# Altium PCB Charging_PCB.PcbDoc
Units mm, origin at the board's own origin, x right, y up, seen from the top; angles counter-clockwise.
Board outline 58.8 x 34.09 mm, 2 copper layers (Top Layer, Bottom Layer), stack 1.57 mm thick; 66 components, 46 nets, 205 pads, 51 vias.
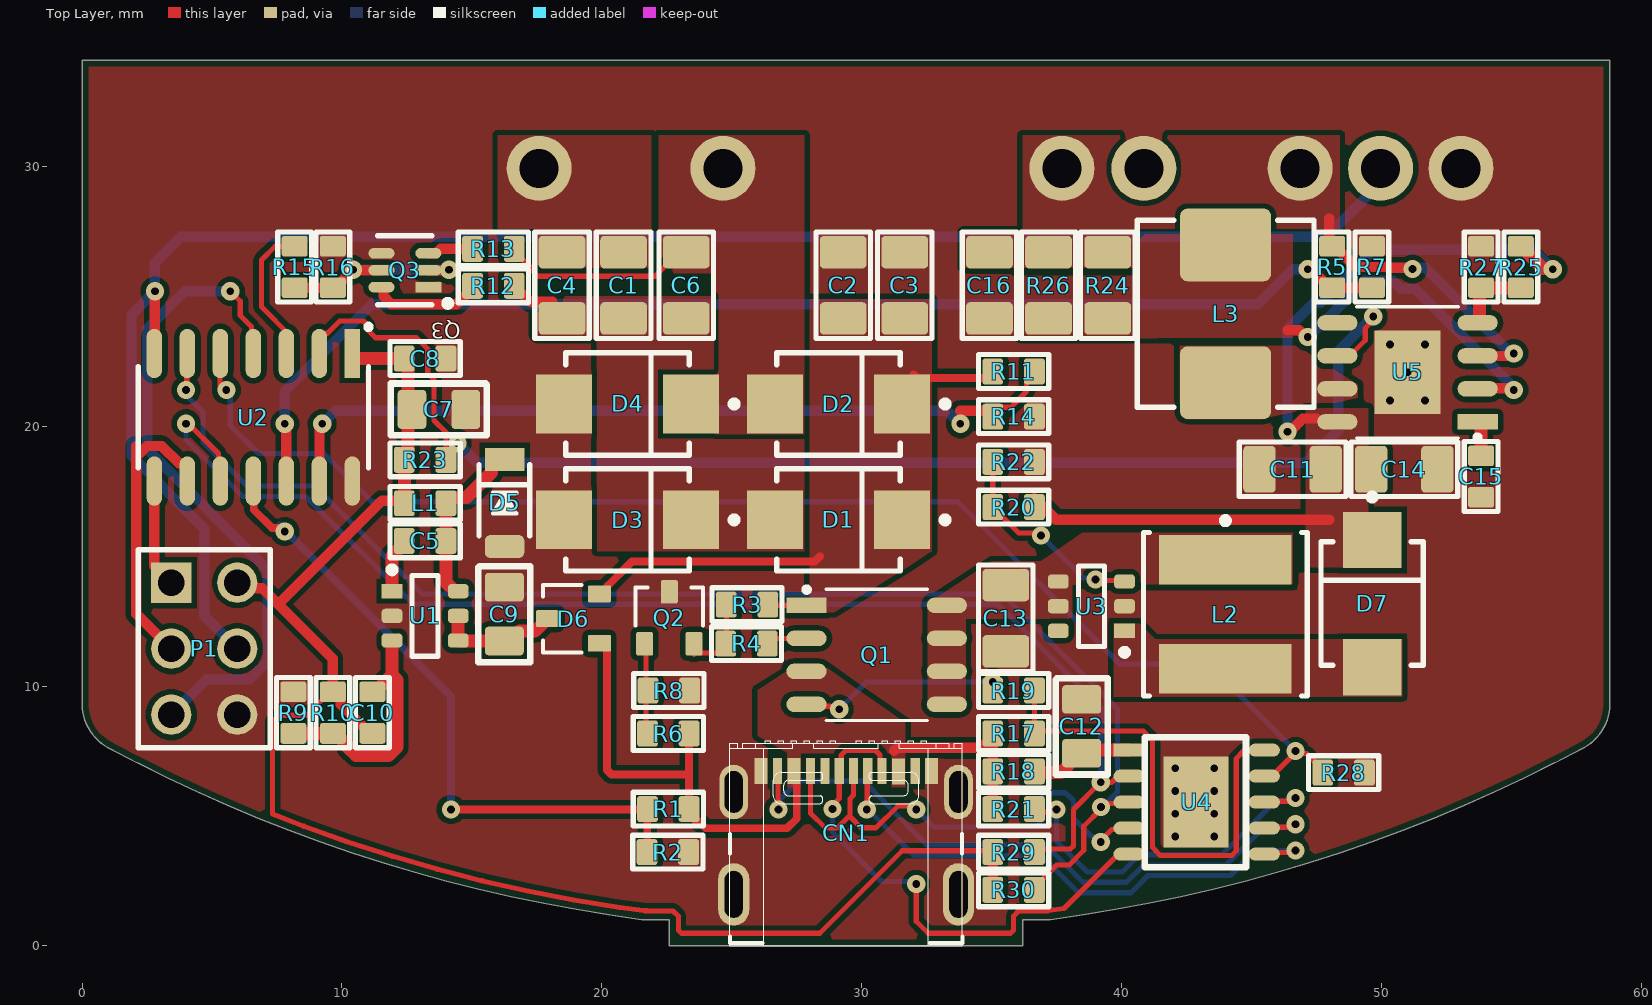
[diagram p0: Top Layer view]
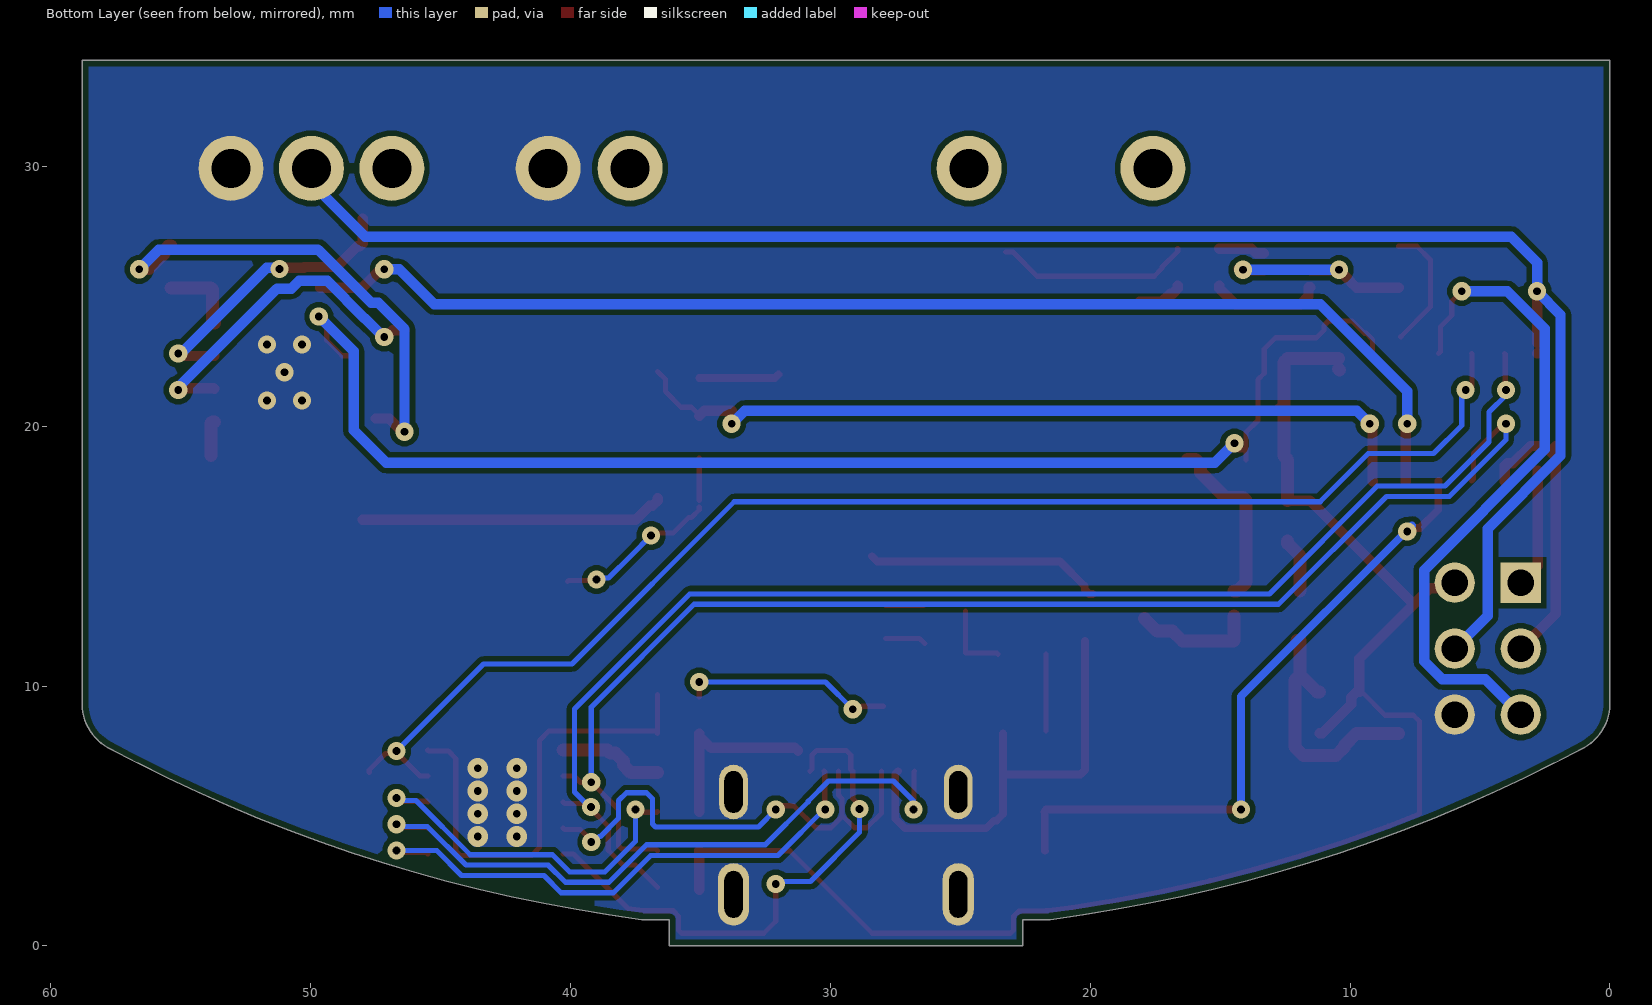
[diagram p1: Bottom Layer view, seen from below]
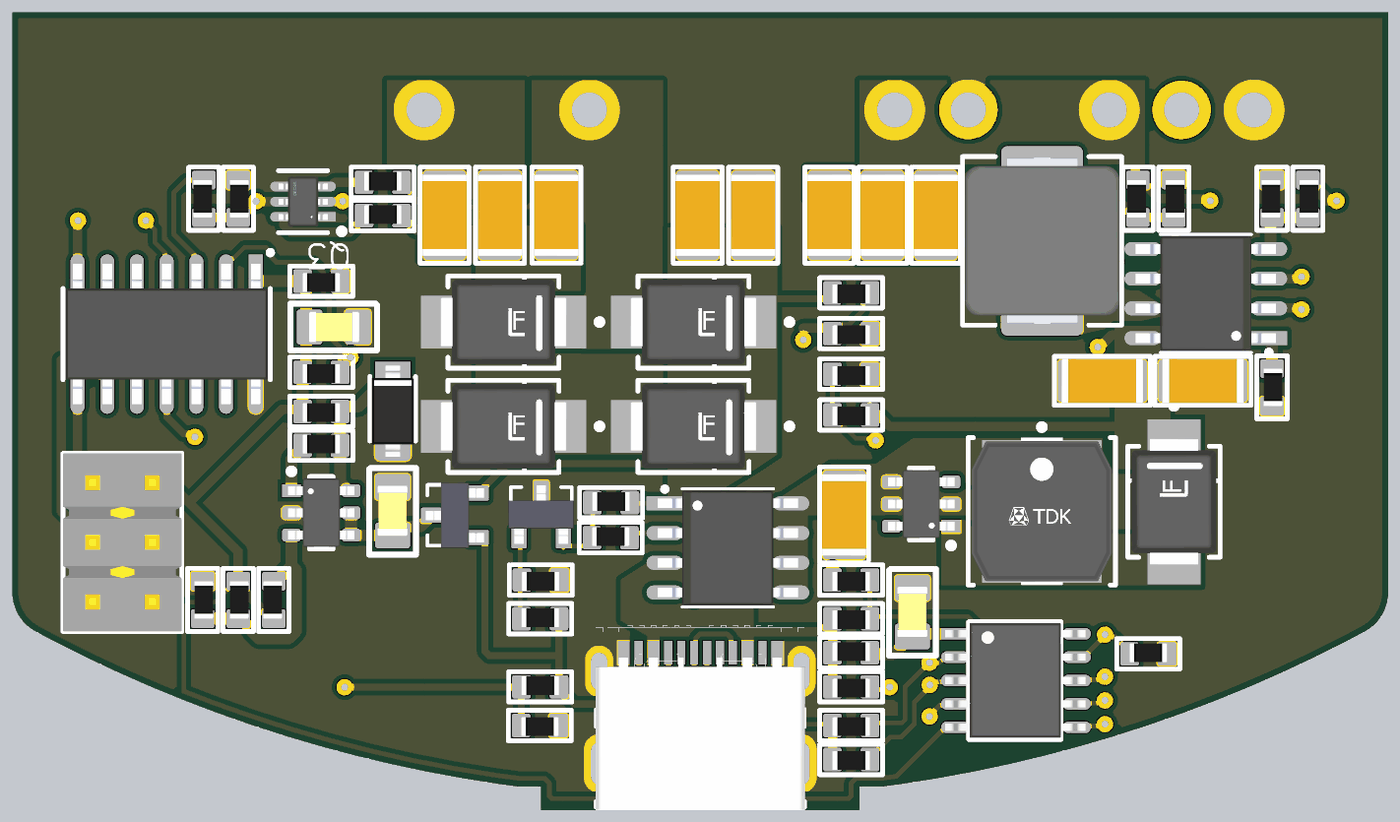
[diagram p2: 3D render of the assembled board from above, using the file's embedded part models]

## Layer stack, top to bottom
Top Solder: solder mask 0.0102, Solder Resist, Dk 3.5
Top Layer: signal copper 0.0356
Dielectric 1: core 1.4986, Core-043, Dk 4.3
Bottom Layer: signal copper 0.0356
Bottom Solder: solder mask 0.0102, Solder Resist, Dk 3.5

## Board outline
21.539,1.017 ccw(c21.788,2.901) 21.788,1.001 22.599,1.001 22.599,0.001 36.199,0.001 36.199,1.001 37.01,1.001 ccw(c37.01,2.901) 37.259,1.017 ccw(c29.399,60.581) 57.797,7.636 ccw(c56.899,9.31) 58.799,9.31 58.799,34.095 -0.001,34.095 -0.001,9.31 ccw(c1.899,9.31) 1.001,7.636 ccw(c29.399,60.581)
board region "Default Layer Stack Region": 21.539,1.017 21.57,1.013 21.632,1.007 21.694,1.003 21.757,1.001 21.788,1.001 22.599,1.001 22.599,0.001 36.199,0.001 36.199,1.001 37.01,1.001 37.041,1.001 37.104,1.003 37.166,1.007 37.228,1.013 37.259,1.017 38.155,1.136 39.94,1.426 41.715,1.77 43.479,2.167 45.23,2.617 46.967,3.12 48.688,3.674 50.391,4.281 52.076,4.938 53.74,5.645 55.382,6.402 57,7.209 57.797,7.636 57.91,7.697 58.118,7.847 58.303,8.024 58.463,8.225 58.595,8.445 58.696,8.681 58.764,8.928 58.799,9.182 58.799,9.31 58.799,34.095 -0.001,34.095 -0.001,9.31 -0.001,9.182 0.033,8.928 0.102,8.681 0.203,8.445 0.334,8.225 0.495,8.024 0.68,7.847 0.888,7.697 1.001,7.636 1.798,7.209 3.416,6.402 5.058,5.645 6.722,4.938 8.406,4.281 10.11,3.674 11.831,3.12 13.568,2.617 15.319,2.167 17.083,1.77 18.858,1.426 20.643,1.136
board region "Layer Stack Region 1": 21.539,1.017 21.57,1.013 21.632,1.007 21.694,1.003 21.757,1.001 21.788,1.001 22.599,1.001 22.599,0.001 36.199,0.001 36.199,1.001 37.01,1.001 37.041,1.001 37.104,1.003 37.166,1.007 37.228,1.013 37.259,1.017 38.155,1.136 39.94,1.426 41.715,1.77 43.479,2.167 45.23,2.617 46.967,3.12 48.688,3.674 50.391,4.281 52.076,4.938 53.74,5.645 55.382,6.402 57,7.209 57.797,7.636 57.91,7.697 58.118,7.847 58.303,8.024 58.463,8.225 58.595,8.445 58.696,8.681 58.764,8.928 58.799,9.182 58.799,9.31 58.799,34.095 -0.001,34.095 -0.001,9.31 -0.001,9.182 0.033,8.928 0.102,8.681 0.203,8.445 0.334,8.225 0.495,8.024 0.68,7.847 0.888,7.697 1.001,7.636 1.798,7.209 3.416,6.402 5.058,5.645 6.722,4.938 8.406,4.281 10.11,3.674 11.831,3.12 13.568,2.617 15.319,2.167 17.083,1.77 18.858,1.426 20.643,1.136

## Design rules (kind name [scope] priority, off if disabled: settings)
BoardOutlineClearance [All] p1: gap=0.25 ignorepadtopadclearanceinfootprint=FALSE except(0: Arc-SplitContinuation Track-SplitContinuation SMDPad-SplitContinuation THPad-SplitContinuation Via-SplitContinuation Fill-SplitContinuation Poly-SplitContinuation Region-SplitContinuation Text-SplitContinuation)
Clearance [All] p1: gap=0.2 ignorepadtopadclearanceinfootprint=FALSE except(0: Arc-Hole Track-Hole SMDPad-Hole THPad-Hole Via-Hole Fill-Hole Poly-Hole Region-Hole Text-Hole)
MinimumSolderMaskSliver [All] p1: minsoldermaskwidth=0.2
PolygonConnect [All] p1: connectstyle=Direct reliefconductorwidth=0.254 reliefentries=4 polygonreliefangle="90 Angle" airgapwidth=0.254
RoutingVias [All] p1: holewidth=0.3 width=0.7 viastyle="Through Hole" minholewidth=0.3 minwidth=0.7 maxholewidth=2 maxwidth=3
SilkToSilkClearance [All] p1: silktosilkclearance=0.2
SilkToSolderMaskClearance [IsPad] p1: minsilkscreentomaskgap=0.2 clearancetoexposedcopper=TRUE
SolderMaskExpansion [All] p1: expansion=0.05 istentingtop=FALSE
Width [All] p1: maxlimit=3 minlimit=0.2 preferedwidth=0.2
27 further rules are at their usual default settings.

## Components (designator, comment, footprint, x,y, rotation, side; value= is the part's Value field where it differs from the comment)
C1 "27nF" 1206 20.84,25.428 r90 top
C2 "33uF" 1206 29.29,25.428 r90 top
C3 "33uF" 1206 31.66,25.428 r90 top
C4 "27nF" 1206 18.47,25.428 r90 top
C5 "0.1uF" R0603 13.2,15.59 r0 top
C6 "0.8nF" 1206 23.25,25.43 r90 top
C7 "10uF" C0805 13.727,20.65 r180 top
C8 "0.1uF" R0603 13.2,22.61 r180 top
C9 "4.7uF 50V" C0805 16.25,12.77 r270 top
C10 "33pF" R0603 11.17,8.982 r90 top
C11 "22uF" 1206 46.587,18.347 r0 top
C12 "1uF" C0805 38.47,8.452 r270 top
C13 "22uF" 1206 35.55,12.615 r90 top
C14 "150uF" 1206 50.887,18.347 r0 top
C15 "470nF" R0603 53.84,18.07 r270 top
C16 "10uF" 1206 34.92,25.428 r90 top
CN1 "USB3.1 TYPE-C 10PF-074" "USB3.1 TYPE-C 10PF-074" 29.402,4.108 r180 top locked
D1 "SK56" DO-214AA(SMB) 29.11,16.4 r180 top
D2 "SK56" DO-214AA(SMB) 29.11,20.86 r180 top
D3 "SK56" DO-214AA(SMB) 20.99,16.4 r180 top
D4 "SK56" DO-214AA(SMB) 20.99,20.86 r180 top
D5 "" SOD-123 16.26,17.05 r90 top
D6 "BAT54C,215" SOT-23 18.91,12.6 r90 top value=10pF
D7 "SK56" DO-214AA(SMB) 49.648,13.18 r270 top
L1 "4.7µH" INDC1608X06L 13.2,17.04 r180 top
L2 "VLS6045EX-6R8M" FP-VLS6045EX-100M-MFG 44,12.77 r270 top
L3 "SRP7028A-100M" INDUCT_7028 44.01,24.332 r90 top
P1 "TSW-103-07-G-D" SMTC-TSW-103-07-G-D_V 4.7,11.443 r270 top
Q1 "IRF7104TRPBF" SO8 27.88,13.111 r0 top
Q2 "BC856" SOT-23 22.6,12.63 r0 top
Q3 "2N7002DWH6327XTSA1" SOT363-IPC_A 12.421,26.007 r180 top
R1 "100K" R0603 22.56,5.269 r0 top
R2 "10K" R0603 22.54,3.614 r180 top
R3 "10K" R0603 25.59,13.14 r0 top
R4 "1K" R0603 25.57,11.64 r0 top
R5 "100K" R0603 48.11,26.132 r90 top
R6 "1K" R0603 22.56,8.178 r0 top
R7 "10K" R0603 49.64,26.132 r270 top
R8 "100K" R0603 22.58,9.832 r180 top
R9 "40.2K" R0603 8.13,8.982 r270 top
R10 "124K" R0603 9.65,8.982 r270 top
R11 "100K" R0603 35.85,22.11 r180 top
R12 "30" R0603 15.828,25.41 r0 top
R13 "30" R0603 15.828,26.832 r0 top
R14 "10K" R0603 35.85,20.37 r180 top
R15 "1K" R0603 8.18,26.132 r90 top
R16 "100K" R0603 9.65,26.132 r270 top
R17 "10K" R0603 35.85,8.178 r180 top
R18 "1K" R0603 35.85,6.723 r0 top
R19 "1K" R0603 35.85,9.832 r180 top
R20 "240K" R0603 35.85,16.89 r180 top
R21 "10K" R0603 35.85,5.269 r180 top
R22 "10K" R0603 35.85,18.63 r180 top
R23 "10K" R0603 13.2,18.71 r180 top
R24 "25 mhOm" 1206 39.47,25.428 r90 top
R25 "510K" R0603 55.37,26.132 r270 top
R26 "25 mhOm" 1206 37.195,25.428 r90 top
R27 "510K" R0603 53.84,26.132 r90 top
R28 "10K" R0603 48.55,6.673 r0 top
R29 "10K" R0603 35.85,3.614 r180 top
R30 "10K" R0603 35.85,2.16 r180 top
U1 "BL9342" SOT23-6 13.2,12.705 r0 top
U2 "ATTINY44A-SSU" SO14 6.59,20.346 r270 top
U3 "SX1308" SOT23-6 38.845,13.08 r180 top
U4 "CH224K" ESSOP10 40.295,7.637 r0 top
U5 "SY6912A" PSOP8 51.01,22.08 r180 top

## Footprints (in the part's own frame and the unit in brackets; to place one, negate y for a bottom-side part, rotate by r counter-clockwise, add the part's x,y. Pads: shape width x height; smd on the part's side, far side on the other; paste and mask are expansions set on the pad)
1206 [mm] "Chip Capacitor, 2-Leads, Body 3.5x1.9mm, IPC High Density"
  rrect25% 1.25x1.8 smd mask+0.05: 1(-1.275,0) 2(1.275,0)
  silkscreen extent -2.05,-1.05 2.05,1.05, body extent -1.75,-0.95 1.75,0.95, height 1.9
C0805 [mm]
  rrect25% 1.1x1.5 smd: 1(-1.039,0) 2(1.032,0)
  silkscreen extent -1.85,-1 1.85,1, body extent -1.1,-0.65 1.05,0.65, height 1.15
DO-214AA(SMB) [mm]
  rect 2.16x2.26 smd paste+0 mask+0: 1(-2.45,0) 2(2.45,0)
  silkscreen extent -4.23,-1.97 2.37,1.97, body extent -3.63,-2.07 3.63,2.07, height 0.25
ESSOP10 [mm]
  rect 1.2x0.5 smd: 1(0,-0.1)
  rrect100% 1.2x0.5 smd: 2(0,-1.1) 3(0,-2.1) 4(0,-3.1) 5(0,-4.1) 6(5.2,-4.1) 7(5.2,-3.1) 8(5.2,-2.1) 9(5.2,-1.1) 10(5.2,-0.1)
  rect 2.5x3.5 smd: 11(2.575,-2.1)
  silkscreen extent 0.6,-4.6 4.5,0.4, body extent -0.42,-4.55 5.57,0.35, height 1.55
FP-VLS6045EX-100M-MFG [mm]
  rect 1.9x5.1 smd paste+0 mask+0: 1(-2.1,0) 2(2.1,0)
  silkscreen extent -3.72,-3.15 3.15,3.15, body extent -3.25,-3.25 3.25,3.25, height 0.25
INDC1608X06L [mm]
  rrect25% 0.8x1 smd: 1(-0.8,0) 2(0.8,0)
  silkscreen extent -1.35,-0.65 1.35,0.65, body extent -0.8,-0.35 0.8,0.45, height 0.5
INDUCT_7028 [mm]
  rrect20% 2.8x3.5 smd: 1(-2.65,0) 2(2.65,0)
  silkscreen extent -3.6,-3.4 3.6,3.4, body extent -3.55,-3.31 3.55,3.29, height 2.8
PSOP8 [mm]
  rrect5% 1.55x0.6 smd mask+0: 1(-2.7,1.905)
  rrect100% 1.55x0.6 smd mask+0: 2(-2.7,0.635) 3(-2.7,-0.635) 4(-2.7,-1.905) 5(2.7,-1.905) 6(2.7,-0.635) 7(2.7,0.635) 8(2.7,1.905)
  rect 2.55x3.2 smd paste-3 mask+0: 9(0,0)
  silkscreen extent -2.79,-2.52 1.95,2.61, body extent -3,-2.45 3,2.45, height 1.7
R0603 [mm]
  rrect25% 0.8x1 smd: 1(-0.8,0) 2(0.8,0)
  silkscreen extent -1.35,-0.65 1.35,0.65, body extent -0.8,-0.35 0.8,0.45, height 0.5
SMTC-TSW-103-07-G-D_V [mm]
  rect 1.55x1.55 hole 1.02: 1(-2.54,-1.27)
  round 1.55 hole 1.02: 2(-2.54,1.27) 3(0,-1.27) 4(0,1.27) 5(2.54,-1.27) 6(2.54,1.27)
  silkscreen extent -3.81,-2.54 3.81,2.54, body extent -3.81,-2.54 3.81,2.54, height 8.38
SO8 [mm]
  rrect5% 1.55x0.6 smd mask+0: 1(0,-0.001)
  rrect100% 1.55x0.6 smd mask+0: 2(0,-1.271) 3(0,-2.541) 4(0,-3.811) 5(5.4,-3.811) 6(5.4,-2.541) 7(5.4,-1.271) 8(5.4,-0.001)
  silkscreen extent -0.09,-4.43 4.65,0.71, body extent -0.3,-4.36 5.7,0.54, height 1.7
SO14 [mm]
  rect 1.9x0.6 smd: 1(-2.455,3.81)
  rrect100% 1.9x0.6 smd: 2(-2.455,2.54) 3(-2.455,1.27) 4(-2.455,0) 5(-2.455,-1.27) 6(-2.455,-2.54) 7(-2.455,-3.81) 8(2.455,-3.81) 9(2.455,-2.54) 10(2.455,-1.27) 11(2.455,0) 12(2.455,1.27) 13(2.455,2.54) 14(2.455,3.81)
  silkscreen extent -3.58,-4.43 1.95,4.53, body extent -3,-4.32 3,4.32, height 1.75
SOD-123 [mil]
  rrect50% 35x60 smd mask+1.97: 1(-66,0)
  rect 35x60 smd mask+1.97: 2(66,0)
  silkscreen extent -50,-38 58,39, body extent -77,-35 77,35, height 46
SOT23-6 [mm] "SOT23, 6-Leads, Body 3.05x1.75mm, Pitch 0.95mm, IPC High Density"
  rect 0.8x0.55 smd mask+0.05: 1(-1.275,0.95)
  rrect50% 0.8x0.55 smd mask+0.05: 2(-1.275,0) 3(-1.275,-0.95) 4(1.275,-0.95) 5(1.275,0) 6(1.275,0.95)
  silkscreen extent -1.4,-1.55 0.5,1.9, body extent -1.42,-1.46 1.42,1.46, height 1.11
SOT363-IPC_A [mm]
  rect 1x0.412 smd paste+0 mask+0: 1(-0.901,0.65)
  rrect100% 1x0.412 smd paste+0 mask+0: 2(-0.901,0) 3(-0.901,-0.65) 4(0.901,-0.65) 5(0.901,0) 6(0.901,0.65)
  silkscreen extent -1.78,-1.33 1.05,1.39, body extent -2.16,-1.58 2.16,1.58, height 0.25
SOT-23 [mm]
  rrect20% 0.65x0.9 smd: 1(-0.95,-1) 2(0.95,-1) 3(0,1)
  silkscreen extent -1.3,-0.3 1.3,1.18, body extent -1.4,-1.25 1.4,1.25, height 1
"USB3.1 TYPE-C 10PF-074" [mm]
  rect 0.5x1 smd mask+0.05: 1(3.273,-2.62) 3(2,-2.62) 10(-2.02,-2.614) 12(-3.287,-2.62)
  rect 0.35x1 smd mask+0.05: 2(2.64,-2.62) 4(1.365,-2.62) 5(0.815,-2.62) 6(0.265,-2.62) 7(-0.285,-2.62) 8(-0.835,-2.62) 9(-1.385,-2.62) 11(-2.66,-2.62)
  oval 1.1x2.1 hole 0.7 slot 1.6 at 90 deg mask+0.05: MH(-4.325,-1.82) MH(4.325,-1.82)
  oval 1.2x2.4 hole 0.7 slot 1.8 at 90 deg mask+0.05: MH(-4.325,2.12) MH(4.325,2.12)
  silkscreen extent -4.48,-0.21 4.47,4, body extent -4.48,-2.4 4.47,4.1, height 3.22

## Part data
C1 C2 C3 C4 C5 C6 C7 C8 C9 C10 C11 C12 C13 C14 C15 C16: library part CAP
CN1: "XKB Connectivity USB-C Connector"
D1 D2 D3 D4 D7: library part DIODE_DO-214, "DO-214 Diode", Manufacturer Part Number=China
D5: library part Diode_SOD123, "Schottky diode SOD123", Note="Schottky diode  SOD123"
D6: library part BAT54C, "DIODE ARRAY SCHOTTKY 30V SOT23", Ambient Temperature Range High=+150°C, Ambient Temperature Range Low=-55°C, Capacitance=10pF, Forward Current=200mA, Manufacturer=Nexperia, Max Surge Forward Current=600mA, Package=SOT23, Peak Reverse Current=2uA, Reverse Voltage=30V, Temperature="to +150°C", Automotive=Yes, Automotive Grade="Grade 0", Category=Diode, ComponentLink2Description=Datasheet, ComponentLink2URL=https://assets.nexperia.com/documents/data-sheet/BAT54_SER.pdf, Device Class L1="Discrete Semiconductors", Device Class L2=Diodes, Device Class L3="Schottky Diodes", Digikey Description="DIODE ARRAY SCHOTTKY 30V SOT23", Footprint Url=https://assets.nexperia.com/documents/outline-drawing/SOT23.pdf, Height=1.1mm, Ipc Land Pattern Name=SOT95P230X100-3, Lead Free=Yes, Manufacturer Part Number=BAT54C,215, Max Junction Temp=+150°C, Mouser Description="Schottky Diodes, Rectifiers - Arrays SOT-23 (TO-236AB) 30V 200mA (DC) Surface Mount", Octopart=https://octopart.com/bat54c%2C215-nexperia-78738945, RoHS=TRUE, Temperature Range High=+150°C
L1: library part IND_1, "Inductor, SMD", Manufacturer="Taiyo Yuden", Manufacturer Part Number=LBMF1608T100K, Part Number=L0603-10µ, Datasheet=http://www.yuden.co.jp/ut/product/pdf/elb2_e.pdf, LatestRevisionDate=2012-09-19, Note="Inductor 10uH 10% 80mA 360mOhm 0603", Pin Count=2, Published=2010-02-24, Publisher="Nordic Semiconductor"
L2: library part VLS6045EX, "FIXED IND  SMD", Case/Package=Nonstandard, DC Resistance (DCR)=61mR, Inductance Tolerance=20%, Max Operating Temperature=105°C, Min Operating Temperature=-40°C, Resistor Type=Wirewound, Test Frequency=100kHz, Core Material=Ferrite, Height - Seated (Max)=0.177inch, Lead Free="Lead Free", Length=0.236inch, Mount="Surface Mount", Packaging="Cut Tape", REACH SVHC="No SVHC", RoHS Compliant=Yes, Shielding=Shielded, Tolerance=20%, Width=0.236inch
L3: library part IND_SRP7028A, "FIXED IND", Inductance=2.2uH, Manufacturer=Panasonic, Manufacturer Part Number=ETQ-P3M2R2YFP, Package=PCC-M0530M, Rms Current=4.8A, Saturation Current=10.9A, Series Resistance=24.8mΩ, Temperature="-40°C to +150°C", Temperature Range High=+150°C, Temperature Range Low=-40°C, Test Frequency=100kHz, Tolerance=20%, Automotive=Yes, Automotive Grade="Grade 0", Category=Ind, ComponentLink2Description=Datasheet, ComponentLink2URL=https://industrial.panasonic.com/cdbs/www-data/pdf/AGL0000/AGL0000C59.pdf, Core Material="Metal Composite", Device Class L1="Passive Components", Device Class L2=Inductors, Device Class L3="Fixed Inductors", Digikey Description="FIXED IND 2.2UH 5.8A 24.8 MOHM", Height=3mm, Lead Free=Yes, Octopart=https://octopart.com/etqp3m2r2yfp-panasonic-65686337, RoHS=TRUE, Shielding=true, Standoff Height=0.05mm
P1: library part CMP-2000-07329-1, "Through Hole Header, Pitch 2.54 mm, 2 x 3 Position, Height 8.58 mm, Tail Length 2.54 mm, -55 to 125 degC, RoHS, Bulk", Color=Black, Manufacturer=Samtec-Inc., Package Description="Through Hole Header, Pitch 2.54 mm, 2 x 3 Position, Height 8.58 mm, Tail Length 2.54 mm", Category=Connectors,Interconnects, Connector Type=Header,Unshrouded, Contact Finish=Gold, Contact Finish Thickness=10µin(0.25µm), Contact Mating Length="0.230\"(5.84mm)", Contact Type=MalePin, Datasheet URL=http://suddendocs.samtec.com/catalog_english/tsw_th.pdf, Datasheet Version=12/2015, Family=RectangularConnectors-Headers,MalePins, Fastening Type=-, Features=-, Manufacturer Part Number=TSW-103-07-G-D, Manufacturer URL=http://www.samtec.com/, Mounting Technology=ThroughHole, Mounting Type=ThroughHole, Number of Positions=6, Number of Positions Loaded=All, Number of Rows=2, Package Reference=TSW-103-07-G-D, Package URL=http://suddendocs.samtec.com/prints/tsw-xxx-xx-xxx-x-xx-xxx-mkt.pdf, Packaging=Bulk, Pitch="0.100\"(2.54mm)", Row Spacing="0.100\"(2.54mm)", Series=TSW, Termination=Solder
Q1: "MOSFET 2P-CH 20V 2.3A 8-SOIC", Case/Package=SO, Continuous Drain Current (ID)=2.3A, Drain to Source Breakdown Voltage=-20V, Drain to Source Resistance=400mR, Gate to Source Voltage (Vgs)=12V, Input Capacitance=290pF, Max Operating Temperature=150°C, Max Power Dissipation=2W, Min Operating Temperature=-55°C, Threshold Voltage=-3V, Drain to Source Voltage (Vdss)=-20V, Halogen Free="Halogen Free", Height=0.059inch, Lead Free="Lead Free", Length=0.196inch, Max Dual Supply Voltage=-20V, Mount="Surface Mount", Number of Pins=8, Packaging="Cut Tape", Polarization=P, Power Dissipation=2W, Rds On Max=250mR, Reach SVHC Compliant=Yes, RoHS Compliant=Yes, Series=HEXFET®, Turn-Off Delay Time=42ns, Turn-On Delay Time=12ns, Width=0.157inch
Q2: "PNP General Purpose Transistor, 65 V, -65 to 150 degC, 3-Pin SOT23, RoHS", Collector Emitter Voltage V(br)ceo=65V, Collector Emitter Voltage Vces=-300mV, Continuous Collector Current Ic Max=100mA, Current Ic hFE=2mA, DC Current Gain hFE=125, Manufacturer=NXP, Operating Temperature Max=150°C, Operating Temperature Min=-65°C, Operating Temperature Range=-65°Cto+150°C, Package / Case=SOT-23, Package Description="3-Pin Small Outline Transistor, Body 1.3 x 2.9 mm, Pitch 0.95 mm", Package Reference=SOT23-3, Package Version=02/2016, Power Dissipation Pd=250mW, Voltage Vcbo=80V, Current Ic Continuous a Max=100mA, Datasheet URL=http://www.nxp.com/documents/data_sheet/BC856_BC857_BC858.pdf, Datasheet Version=01/2004, DC Collector Current=100mA, Device Marking=BC856, Gain Bandwidth ft Min=100MHz, Gain Bandwidth ft Typ=150MHz, Hfe Min=125, Manufacturer URL=http://www.nxp.com/, Mounting Technology=SurfaceMount, No. of Pins=3, No. of Transistors=1, Noise Factor Max=10dB, Package URL=http://www.nxp.com/documents/outline_drawing/SOT23.pdf, Power Dissipation Ptot Max=250mW, SMD Marking=3D, SVHC=NoSVHC(19-Dec-2012), Termination Type=SMD, Transistor Case Style=SOT-23, Transistor Polarity=PNP
Q3: library part WM06DN03D, "MOSFET 2N-CH 60V 0.3A SOT363", Case/Package=SOT-363-6, Continuous Drain Current (ID)=300mA, Drain to Source Voltage (Vdss)=60V, Gate to Source Voltage (Vgs)=20V, Input Capacitance=20pF, Max Operating Temperature=150°C, Max Power Dissipation=500mW, Min Operating Temperature=-55°C, Fall Time=3.1ns, FET Type="2 N-Channel", Halogen Free="Halogen Free", Lead Free="Lead Free", Max Dual Supply Voltage=60V, Mount="Surface Mount", Number of Elements=2, Number of Pins=6, Packaging="Tape and Reel", Power Dissipation=500mW, Rds On Max=3R, REACH SVHC="No SVHC", Rise Time=3.3ns, Turn-Off Delay Time=5.5ns, Turn-On Delay Time=3ns
R1 R2 R3 R4 R5 R6 R7 R8 R9 R10 R11 R12 R13 R14 R15 R16 R17 R18 R19 R20 R21 R22 R23 R24 R25 R26 R27 R28 R29 R30: library part "RES SMD UNI", "Resistor SMD", Category=Resistors
U1 U2: Package=None, Availability=Unavailable, Price=None
  U1: MF="{'manufacturer': u'Texas Instruments'}", MP=BL9342
  U2: MF="{'manufacturer': u'Microchip'}", MP=ATTINY44A-SSU
U3: "IC REG BOOST ADJ 2A TSOT23-6", Case/Package=SOT-6, Manufacturer=Suosemi, Max Input Voltage=28V, Max Operating Temperature=125°C, Max Output Voltage=26V, Min Input Voltage=4.5V, Min Operating Temperature=-40°C, Min Output Voltage=600mV, Output Current=2A, Quiescent Current=40uA, Switching Frequency=500kHz, Lead Free="Lead Free", Manufacturer Part Number=SX1308, Number of Outputs=1, Number of Pins=6, Output Voltage=26V, Packaging="Cut Tape", REACH SVHC="No SVHC"
U4: "IC PD QC USB driver", Manufacturer=ST, Manufacturer Part Number=ST3485EBDR, Note="IC TXRX 3.3V RS485/422 8 SOIC"

## Free pads (board coordinates)
  round 2.5 hole 1.5: 2(17.59,29.93) 2(24.66,29.93) 2(37.71,29.93) 2(40.86,29.93) 2(46.88,29.93) 2(49.975,29.93) 2(53.07,29.93)

## Via types
v1: diameter 0.7, hole 0.3, Top Layer to Bottom Layer, 43 vias
v2: diameter 0.8, hole 0.3, Top Layer to Bottom Layer, 8 vias

## Nets (pads, with @x,y where several pads share a name; then routed paths per layer and width w, separated by ;. In a path a pad name is that pad's centre, name@x,y a point inside that pad or via, vN(x,y) a via of type N, cw(c..) or ccw(c..) an arc to the next point about the centre after c; other vN are vias at no path point)
"3,3V BAT": C7.2 C8.2 C10.1 L1.2 P1.2 R10.1 R23.2 R29.2 R30.2 U2.1 | length 60.8
  Top Layer w0.2: R10.1 9.55,9.782 8.65,8.882 7.564,8.882 7.33,8.648 7.33,5.076 8.529,4.609 10.222,4.006 11.933,3.455 13.66,2.955 15.401,2.507 17.155,2.113 18.92,1.771 20.694,1.482 21.61,1.361 21.661,1.356 21.711,1.353 21.762,1.351 22.744,1.351 22.949,1.146 22.949,0.605 23.066,0.488 28.388,0.488 31.564,3.664 R29.2@35.05,3.664
  Top Layer w0.4: P1.2 6.19,13.763 6.937,13.763 7.55,13.15 ; C10.1 11.07,8.182 9.95,9.302 9.95,9.582 9.75,9.782 R10.1 9.65,11.05 7.55,13.15 ; L1.2@12.4,17.14 11.54,17.14 7.55,13.15 ; R30.2 R29.2@35.05,3.664
  Top Layer w0.5: U2.1@10.4,22.16 U2.1@10.45,22.21 ; U2.1@10.45,22.61 C8.2 12.547,22.463 12.547,20.797 C7.2 12.547,20.503 12.547,18.857 R23.2 L1.2@12.4,17.14
+15V: C11.2 C14.1 D7.1 R20.1 R25.1 U5.8 | length 30.5
  Top Layer w0.4: R20.1@36.65,17.24 36.65,17.14 36.85,16.94 36.95,16.94 37.49,16.4 48,16.4 ; v1(46.389,19.792) 46.471,19.792 46.979,20.3 47.5,20.3
  Top Layer w0.5: R25.1 55.47,26.932 55.62,26.782 55.62,26.682 56.221,26.081 56.562,26.081 v1(56.6,26.043)
  Bottom Layer w0.4: v1(46.389,19.792) 46.389,23.739 47.4,24.75 47.669,24.75 49.719,26.8 55.843,26.8 v1(56.6,26.043)
"BATTERY +": C16.2 pad.2@37.71,29.93 pad.2@46.88,29.93 R5.2 R24.2 R26.2 U5.3 | length 11.3
  Top Layer w0.4: 48,28 48,27.042 R5.2 48.21,26.932 49.01,26.132 50.247,26.132 50.272,26.107 51.143,26.107 v1(51.2,26.05) ; U5.3 53.717,22.708 55.092,22.708 v1@55.1,22.7
  Bottom Layer w0.4: v1(51.2,26.05) 51.25,26.1 51.7,26.1 v1@55.1,22.7
  other v1: 55.1,22.8
CFG1: R28.1 U2.5 U4.9 | length 52.3
  Top Layer w0.2: U2.5 5.31,22.791 5.31,21.44 v1@5.55,21.2 ; U4.9 45.791,6.537 46.7,7.446 v1(46.7,7.5) 46.796,7.404 47.119,7.404 47.75,6.773 R28.1
  Bottom Layer w0.2: v1@5.7,21.35 5.7,20.033 6.783,18.95 9.3,18.95 11.15,17.1 33.7,17.1 39.945,10.855 43.345,10.855 v1(46.7,7.5)
  other v1: 5.55,21.4
CFG2: R29.1 U2.10 U4.2 | length 51.5
  Top Layer w0.2: v1@4,20.2 4,20.195 5.243,18.952 5.243,17.968 U2.10 ; R29.1@36.65,3.664 36.718,3.733 38.033,3.733 38.15,3.85 38.15,4.881 38.15,5.25 v1(39.2,6.3) ; v1@39.296,6.296 39.622,6.296 39.864,6.537 U4.2
  Bottom Layer w0.2: v1(4,20.1) 4,19.484 6.184,17.3 8.6,17.3 12.75,13.15 35.25,13.15 39.2,9.2 v1@39.2,6.2
CFG3: R30.1 U2.6 U4.3 | length 52.8
  Top Layer w0.2: v1@4,21.2 4.025,21.225 4.025,22.777 U2.6 ; R30.1@36.65,2.26 37.512,3.122 37.988,3.122 38.55,3.684 38.55,4.612 v1@39.21,5.272 ; v1@39.21,5.3 39.335,5.3 39.515,5.48 40.238,5.48 U4.3
  Bottom Layer w0.2: v1@4,21.2 4.65,20.55 4.65,19.4 6.35,17.7 8.95,17.7 13.1,13.55 35.416,13.55 39.85,9.116 39.85,5.931 v1@39.21,5.29
  other v1: 39.21,5.35 4,21.4
CHARGING: R23.1 U2.2 U5.6 | length 52.8
  Top Layer w0.2: U2.2 9.13,23.343 9.37,23.583 9.447,23.583 9.915,24.051 10.824,24.051 11,23.876 11,23.7 11.29,23.41 12.866,23.41 13.3,22.976 13.3,22.044 13.545,21.799 13.545,20.227 14,19.772 R23.1@14,19.1 ; R23.1 R23.1@14,19.1 ; v1(14.45,19.35) 14.45,19.26 14.29,19.1 R23.1@14,19.1 ; U5.6 48.785,22.715 49.385,23.315 49.385,23.788 49.689,24.093 v1(49.689,24.228) 49.7,24.217 v1@49.7,24.2
  Bottom Layer w0.4: v1(14.45,19.35) 15.2,18.6 47.1,18.6 48.35,19.85 48.35,22.889 v1(49.689,24.228)
"COIL N": C6.2 D2.2 D4.1 pad.2@24.66,29.93 R13.2 | length 7.5
  Top Layer w0.2: R13.2 16.628,26.732 17.233,26.127 17.233,26.083 17.537,25.778 22.048,25.778 22.975,26.705 C6.2
"COIL ~": C1.2 C4.2 pad.2@17.59,29.93
DM: CN1.6 CN1.9 U4.5 | length 20.9
  Top Layer w0.2: v1(28.875,5.275) 28.875,5.41 29.138,5.673 CN1.6 29.213,6.803 29.213,7.352 29.389,7.528 30.537,7.528 30.713,7.352 30.713,6.803 CN1.9 ; v1(32.1,2.39) 32.1,0.95 32.562,0.488 35.732,0.488 35.849,0.605 35.849,1.146 36.063,1.36 37.177,1.36 37.188,1.361 37.791,1.441 39.887,3.537 U4.5
  Bottom Layer w0.2: v1(28.875,5.275) 28.875,4.375 30.764,2.486 32.047,2.486 v1@32.132,2.4
DP: CN1.4 CN1.7 U4.4 | length 19.4
  Top Layer w0.2: CN1.4 28.038,5.112 28.6,4.55 29.069,4.55 29.525,5.006 ; CN1.7 29.688,5.807 29.55,5.669 29.55,4.981 29.981,4.55 30.557,4.55 31.407,5.4 v1@32.1,5.4 ; v1@39.15,4 39.63,4.48 40.238,4.48 U4.4
  Bottom Layer w0.2: v1(32.1,5.25) 32.772,4.578 34.98,4.578 36.733,4.578 36.85,4.695 36.85,5.669 37.081,5.9 37.85,5.9 38.15,5.6 38.15,4.916 38.848,4.217 38.897,4.217 39.065,4.05 v1@39.2,4.05
  other v1: 39.2,4
GND: C2.2 C3.2 C7.1 C8.1 C9.1 C11.1 C12.1 C13.1 C14.2 C15.2 C16.1 CN1.1 CN1.12 CN1.MH D3.2 D4.2 D5.1 P1.6 pad.2@40.86,29.93 pad.2@53.07,29.93 Q2.3 Q3.1 Q3.4 R2.1 R7.1 R8.1 R9.1 R14.1 R16.1 R22.1 R27.2 R28.2 U1.2 U2.14 U3.2 U4.11 U5.9
  other v1: 50.333,20.995 51.678,20.995 51.01,22.08 50.333,23.155 51.678,23.155
  other v2: 42.07,4.212 43.57,4.212 42.07,5.087 43.57,5.087 42.07,5.962 43.57,5.962 42.07,6.837 43.57,6.837
"MAIN POWER LINE+": C13.2 L2.1 Q1.5 Q1.6 Q1.7 Q1.8 U3.4 U3.5
NetC1_1: C1.1 C4.1 C6.1 D1.2 D3.1 R12.2 | length 1.8
  Top Layer w0.4: R12.2 16.628,25.31 16.828,25.11 16.928,25.11 17.238,24.8 18.1,24.8
NetC5_1: C5.1 U1.1 | length 2.1
  Top Layer w0.5: U1.1 11.925,15.015 12.4,15.49 C5.1
NetC5_2: C5.2 D5.2 L1.1 U1.6 | length 6.9
  Top Layer w0.5: U1.6 14.35,13.655 14,14.005 C5.2 14,17.14 14.114,17.254 14.788,17.254 15.748,18.214 15.748,18.532 15.943,18.726 D5.2
NetC9_2: C9.2 D6.3 U1.4 U1.5 | length 4.7
  Top Layer w0.5: U1.5 U1.4 14.484,11.746 16.241,11.746 C9.2 16.45,11.738 16.837,12.125 17.435,12.125 D6.3
NetC10_2: C10.2 R9.2 R10.2 U1.3 | length 9.8
  Top Layer w0.5: R9.2 R10.2 9.75,8.182 10.22,7.712 10.22,7.655 10.542,7.332 11.798,7.332 12.12,7.655 12.12,10.242 11.925,10.437 ; C10.2 11.27,9.782 11.925,10.437 ; U1.3@12.05,11.755 U1.3 11.925,10.437
NetC12_2: C12.2 R18.2 U4.1 | length 4.1
  Top Layer w0.5: R18.2@36.65,6.671 37.677,6.671 37.97,6.964 37.97,7.12 38.27,7.42 C12.2 38.587,7.537 U4.1
NetC15_1: C15.1 U5.1 | length 1.4
  Top Layer w0.5: U5.1 53.79,20.175 53.84,20.125 C15.1
NetCN1_2: CN1.2 U4.7 | length 25.1
  Top Layer w0.2: CN1.2 26.781,6.709 26.781,5.619 v1@26.8,5.6 ; U4.7 45.527,4.569 46.669,4.569 v1@46.7,4.6
  Bottom Layer w0.2: v1@26.8,5.6 26.819,5.6 27.569,6.35 30.069,6.35 30.85,5.569 30.85,5.55 32.5,3.9 37.066,3.9 38.516,2.45 40.2,2.45 40.862,3.112 44.026,3.112 45.514,4.6 v1@46.7,4.6
  other v1: 46.7,4.687 26.8,5.25
NetCN1_8: CN1.8 U4.6 | length 21.3
  Top Layer w0.2: v1@30.2,5.3 30.219,5.319 30.219,6.709 CN1.8 ; U4.6 45.552,3.594 46.642,3.594 v1@46.721,3.673
  Bottom Layer w0.2: v1@30.2,5.3 32.012,3.488 36.912,3.488 38.35,2.05 40.366,2.05 41.028,2.712 44.191,2.712 45.153,3.673 v1@46.721,3.673
  other v1: 46.7,3.673 30.2,5.25
NetD7_2: D7.2 L2.2 U3.1
NetL3_1: L3.1 U5.7
NetP1_1: P1.1 U2.8 | length 4.6
  Top Layer w0.4: U2.8@2.78,18.292 2.78,14.633 P1.1
NetP1_3: P1.3 U2.9 | length 11.4
  Top Layer w0.4: 2.08,18.831 2.49,19.242 3.07,19.242 3.732,18.58 3.958,18.58 4.05,18.487 U2.9 ; 2.08,19.231 2.08,12.793 P1.3
NetQ1_2: Q1.2 R4.2 | length 1.6
  Top Layer w0.2: R4.2 26.57,11.84 Q1.2
NetQ1_4: Q1.4 R19.2 | length 8.3
  Top Layer w0.2: Q1.4@27.953,9.223 28.782,9.223 v1@29.137,8.869 ; R19.2@35.05,9.582 v1(35.05,10.165)
  Bottom Layer w0.2: v1(29.137,9.11) 30.192,10.165 v1(35.05,10.165)
NetQ2_1: Q2.1 R6.1 R8.2 | length 3
  Top Layer w0.2: R6.1@21.7,8.284 Q2.1@21.7,11.237
NetQ2_2: Q2.2 R3.1 R4.1 | length 2.9
  Top Layer w0.2: Q2.2@23.55,11.23 23.597,11.278 24.8,11.278 R3.1@24.8,12.882
NetQ3_2: Q3.2 Q3.5 R15.1 R16.2 | length 8.4
  Top Layer w0.4: R15.1@8.13,25.332 R16.2 9.75,25.332 9.95,25.532 9.95,25.537 10.42,26.007 Q3.5 ; Q3.2 13.324,26.009 14.097,26.009 v1(14.116,26.028) 14.239,26.028 v1@14.28,26.07
  Bottom Layer w0.4: v1(10.42,26.028) v1(14.116,26.028)
NetQ3_3: Q3.3 R13.1 | length 1.8
  Top Layer w0.4: Q3.3 13.619,26.657 13.794,26.832 R13.1
NetQ3_6: Q3.6 R12.1 | length 4.3
  Top Layer w0.4: Q3.6 11.594,25.357 11.6,25.351 11.6,25 11.9,24.7 14.418,24.7 15.028,25.31 R12.1
NetR1_1: R1.1 R2.2 U2.11 | length 25.3
  Top Layer w0.3: U2.11 6.605,17.877 6.605,16.795 7.309,16.091 7.759,16.091 v1@7.8,16.05 ; v1(14.2,5.25) R1.1@21.7,5.251 ; R2.2@21.74,3.664 21.75,3.674 21.75,5.159 R1.1@21.76,5.169
  Bottom Layer w0.3: v1@7.611,16.189 14.2,9.6 v1(14.2,5.25)
  other v1: 7.8,15.95
NetR5_1: R5.1 R7.2 U2.12 | length 47.5
  Top Layer w0.4: v1@7.8,20.119 7.8,20.019 7.86,19.959 U2.12 ; v1(47.167,26.043) 47.299,26.043 48.01,25.332 R5.1 R7.2
  Bottom Layer w0.4: v1@7.8,20.2 7.8,21.35 11.15,24.7 45.248,24.7 46.59,26.043 v1(47.167,26.043)
  other v1: 7.8,20.1
NetR11_1: R11.1 R14.2 U2.13 | length 31.3
  Top Layer w0.2: R14.2 35.05,20.4 35.05,20.436 35.35,20.736 35.75,20.736 36.35,21.336 36.35,21.81 R11.1
  Top Layer w0.4: U2.13 9.134,17.896 9.134,20.015 9.239,20.119 v1@9.239,20.2 ; 33.8,20.6 34.85,20.6 R14.2@35.05,20.4
  Bottom Layer w0.4: v1(9.239,20.1) 9.739,20.6 33.3,20.6 v1(33.8,20.1)
NetR17_1: R17.1 R19.1 U4.10 | length 18.5
  Top Layer w0.2: R17.1@36.65,8.177 36.743,8.27 40.836,8.27 41.2,7.906 41.2,3.8 41.32,3.68 41.32,3.663 41.496,3.487 44.244,3.487 44.42,3.663 44.42,7.22 44.7,7.5 45.458,7.5 U4.10 ; R17.1 R19.1@36.65,9.682
NetR20_2: R20.2 R22.2 U3.3 | length 8.1
  Top Layer w0.2: R20.2 35.05,16.79 35.35,16.49 35.45,16.49 36.044,15.896 36.804,15.896 v1(36.9,15.8) ; R20.2@35.05,17.14 R20.2@35.05,17.35 ; R20.2@35.05,17.24 R20.2@35.05,17.35 ; R22.2@35.05,18.78 R20.2@35.05,17.35 ; v1(39,14.1) 39.035,14.065 40.085,14.065 U3.3
  Bottom Layer w0.2: v1(36.9,15.8) 37.648,15.052 38.54,14.16 38.94,14.16 v1(39,14.1)
NetR21_1: R21.1 U4.8 | length 14.1
  Top Layer w0.2: R21.1@36.65,5.169 36.669,5.15 v1@37.5,5.15 ; U4.8 45.527,5.569 46.669,5.569 v1@46.7,5.6
  Bottom Layer w0.2: v1(37.5,5.25) 37.5,4.031 38.681,2.85 40.034,2.85 40.696,3.512 43.86,3.512 45.948,5.6 v1@46.7,5.6
  other v1: 46.7,5.7
NetR25_2: R25.2 R27.1 U5.4 | length 2.9
  Top Layer w0.5: U5.4 53.729,23.985 53.775,24.031 53.775,25.267 R27.1 R25.2
ONEWIRE: P1.4 pad.2@49.975,29.93 U2.7 | length 67.4
  Top Layer w0.4: U2.7 U2.7@2.79,22.811 ; U2.7@2.79,23.211 2.79,25.19 v1(2.8,25.2)
  Bottom Layer w0.4: P1.4 4.7,12.713 4.7,16.066 1.9,18.866 1.9,24.3 v1(2.8,25.2) 2.8,26.3 3.8,27.3 47.895,27.3 pad.2@49.975,29.38
"Qi DATA": R15.2 U2.3 | length 4.9
  Top Layer w0.2: U2.3@8.05,23.45 6.9,24.6 6.9,26.4 7.432,26.932 R15.2@8.13,26.932
"Qi OUT+": C2.1 C3.1 D1.1 D2.1 D6.2 Q1.1 R3.2 R11.2 | length 13.8
  Top Layer w0.2: R3.2 26.42,13.11 Q1.1
  Top Layer w0.3: D6.2 20.035,13.55 20.21,13.725 20.21,13.85 21.16,14.8 28.2,14.8 28.4,15 ; 32,22 32.14,21.86 R11.2@35.05,21.86
RESET: P1.5 U2.4 | length 25.9
  Top Layer w0.2: v1(5.7,25.2) 6.087,24.813 6.087,24.263 6.52,23.83 6.52,22.872 U2.4
  Bottom Layer w0.4: P1.5 4.795,10.268 6.457,10.268 7.145,10.956 7.145,14.469 2.5,19.114 2.5,23.75 3.95,25.2 v1(5.7,25.2)
RS_SY: L3.2 R24.1 R26.1 U5.2 | length 12.8
  Top Layer w0.4: 46.4,23.7 46.841,23.7 47.106,23.434 v1@47.188,23.434 ; U5.2 53.737,21.472 55.072,21.472 v1@55.1,21.5
  Bottom Layer w0.4: v1@47.188,23.434 47.903,24.15 47.918,24.15 49.368,25.6 50.45,25.6 50.75,25.3 51.3,25.3 v1@55.1,21.5
  other v1: 55.1,21.4 47.167,23.434
VBUS: CN1.3 CN1.10 D6.1 Q1.3 R1.2 R6.2 R17.2 R18.1 R21.2 | length 24.8
  Top Layer w0.3: D6.1@20.2,11.75 20.2,6.776 20.376,6.6 23.36,6.6 ; R6.2 23.36,6.6 ; CN1.3 27.5,6.63 27.5,4.9 27.128,4.528 24.001,4.528 23.71,4.819 23.61,4.819 23.36,5.069 R1.2 23.36,6.6
  Top Layer w0.4: 31.246,7.51 31.363,7.628 33.157,7.628 33.161,7.623 34.596,7.623 R17.2@35.05,8.077 ; R21.2@35.05,5.169 R21.2 R18.1 R17.2@35.05,8.077 ; R17.2@35.05,8.177 R17.2@35.05,8.077
pads on no net: CN1.5 CN1.11 U3.6 U5.5

## Polygon pours and split planes (outlines as drawn)
GND on Top Layer "GND_L01_P013" (solid, remove dead copper, pour order 13): 21.539,1.017 ccw(c21.788,2.901) 21.788,1.001 22.599,1.001 22.599,0.001 36.199,0.001 36.199,1.001 37.01,1.001 37.011,1.001 ccw(c37.011,2.901) 37.26,1.017 37.259,1.017 ccw(c29.399,60.581) 57.797,7.636 ccw(c56.899,9.31) 58.799,9.31 58.799,34.095 -0.001,34.095 -0.001,9.31 ccw(c1.899,9.31) 1.001,7.636 ccw(c29.399,60.581)
NetL3_1 on Top Layer "NETL3_1_L01_P005" (solid, pour order 5): 49.1,21.609 49.1,21.1 45.421,20.281 42.243,20.268 42.243,23.109 46.742,23.109
+15V on Top Layer "+15V_L01_P004" (solid, pour order 4): 49.5,14.554 49.5,19.8 49.5,20.7 47.1,20.7 47.1,14.57
VBUS on Top Layer "VBUS_L01_P002" (solid, pour order 2): 27.147,7.436 26,8.094 26,9.856 27.326,10.697 28.68,10.704 30.15,9.65 31.689,8.6 31.689,6.1 31,6.1 31,7.3 27.8,7.3 27.8,6.1 27.147,6.1
"COIL ~" on Top Layer "COIL_~_L01_P012" (solid, pour order 12): 21.8,26.1 21.9,26.2 21.9,31.2 16,31.2 16,27.6 17.4,27.6 17.4,26.1
"COIL N" on Top Layer "COIL_N_L01_P011" (solid, pour order 11): 24.3,19.7 27.8,19.7 27.8,31.2 22.2,31.2 22.2,25.9 24.3,25.9
"MAIN POWER LINE+" on Top Layer "MAIN_POWER_LINE+_L01_P003" (solid, pour order 3): 36.9,14.8 38.498,15.9 46.6,15.9 46.6,13.9 38.1,13.9 38.1,12.6 34,12.6 34,9.15 32.55,9.15 32.55,13.198 35,14.8
NetD7_2 on Top Layer "NETD7_2_L01_P009" (solid, pour order 9): 39.7,12.4 40.7,12.4 41.3,11.8 50.8,11.8 50.8,9.6 39.7,9.6
"Qi OUT+" on Top Layer "QI_OUT+_L01_P010" (solid, pour order 10): 28,12.85 28.945,12.85 31.8,14.6 32.7,15.2 32.7,24.9 28,24.9
NetC1_1 on Top Layer "NETC1_1_L01_P000" (solid, pour order 0): 27.8,15.2 19.8,15.2 19.8,23.4 17.5,23.4 17.4,23.5 17.4,25 24.3,25 24.3,19.5 27.8,19.5
"BATTERY +" on Top Layer "BATTERY_+_L01_P008" (solid, pour order 8): 33.9,26.1 33.9,27.5 36.2,27.5 36.2,31.2 48.4,31.2 48.4,27.6 40.5,27.6 40.5,26.1
RS_SY on Top Layer "RS_SY_L01_P007" (solid, pour order 7): 46.6,27.4 46.6,23.4 36.1,23.4 36.1,25.8 40.7,25.8 40.7,27.2 40.9,27.4
GND on Bottom Layer "GND_L02_P014" (solid, remove dead copper, pour order 14): 21.539,1.017 ccw(c21.788,2.901) 21.788,1.001 22.599,1.001 22.599,0.001 36.199,0.001 36.199,1.001 37.01,1.001 37.011,1.001 ccw(c37.011,2.901) 37.26,1.017 37.259,1.017 ccw(c29.399,60.581) 57.797,7.636 ccw(c56.899,9.31) 58.799,9.31 58.799,34.095 -0.001,34.095 -0.001,9.31 ccw(c1.899,9.31) 1.001,7.636 ccw(c29.399,60.581)

## Silkscreen, mask and mechanical layers (free items; w line width, h text height)
Top Overlay:
  lines w0.013: 25.229,7.611 25.229,7.811 24.929,7.811 24.929,7.611 ; 25.429,7.611 25.429,7.811 25.929,7.811 ; 25.929,7.611 25.929,7.811 ; 26.299,7.811 26.299,7.901 26.499,7.901 26.499,7.811 ; 26.799,7.811 26.799,7.901 26.999,7.901 26.999,7.811 ; 27.299,7.811 27.299,7.901 27.499,7.901 27.499,7.811 ; 27.799,7.811 27.799,7.901 27.999,7.901 27.999,7.811 ; 28.299,7.811 28.299,7.901 28.499,7.901 28.499,7.811 ; 28.799,7.811 28.799,7.901 28.999,7.901 28.999,7.811 ; 29.799,7.811 29.799,7.901 29.999,7.901 29.999,7.811 ; 30.299,7.811 30.299,7.901 30.499,7.901 30.499,7.811 ; 30.799,7.811 30.799,7.901 30.999,7.901 30.999,7.811 ; 31.299,7.811 31.299,7.901 31.499,7.901 31.499,7.811 ; 31.799,7.811 31.799,7.901 31.999,7.901 31.999,7.811 ; 32.299,7.811 32.299,7.901 32.499,7.901 32.499,7.811 ; 32.869,7.611 32.869,7.811 ; 33.369,7.611 33.369,7.811 32.869,7.811 ; 33.569,7.611 33.569,7.811 33.869,7.811 33.869,7.611 ; 24.929,7.611 26.229,7.611 ; 24.929,7.611 24.929,0.001 26.229,0.001 ; 25.929,7.811 27.349,7.811 ; 26.229,0.001 32.569,0.001 ; 26.229,0.001 26.229,7.611 ; 26.229,7.611 27.349,7.611 27.349,7.811 ; 27.349,7.811 28.149,7.811 ; 28.149,7.811 30.649,7.811 ; 28.149,7.811 28.149,7.611 30.649,7.611 30.649,7.811 ; 30.649,7.811 31.449,7.811 ; 31.449,7.811 32.869,7.811 ; 31.449,7.811 31.449,7.611 32.569,7.611 ; 32.569,0.001 33.869,0.001 33.869,7.611 ; 32.569,0.001 32.569,7.611 ; 32.569,7.611 33.869,7.611 ; 26.599,5.781 ccw(c26.899,5.781) 26.899,5.481 28.399,5.481 ccw(c28.399,5.581) 28.499,5.581 28.499,5.681 ccw(c28.399,5.681) 28.399,5.781 27.199,5.781 cw(c27.199,5.981) 26.999,5.981 26.999,6.181 cw(c27.199,6.181) 27.199,6.381 28.399,6.381 ccw(c28.399,6.481) 28.499,6.481 28.499,6.581 ccw(c28.399,6.581) 28.399,6.681 26.899,6.681 ccw(c26.899,6.381) 26.599,6.381 26.599,5.781 ; 30.299,5.581 ccw(c30.399,5.581) 30.399,5.481 31.899,5.481 ccw(c31.899,5.781) 32.199,5.781 32.199,6.381 ccw(c31.899,6.381) 31.899,6.681 30.399,6.681 ccw(c30.399,6.581) 30.299,6.581 30.299,6.481 ccw(c30.399,6.481) 30.399,6.381 31.599,6.381 cw(c31.599,6.181) 31.799,6.181 31.799,5.981 cw(c31.599,5.981) 31.599,5.781 30.399,5.781 ccw(c30.399,5.681) 30.299,5.681 30.299,5.581
Mechanical 1:
  lines w0.013: 37.01,1.001 36.199,1.001 36.199,0.001 33.869,0.001 22.599,0.001 22.599,1.001 21.788,1.001 cw(c21.788,2.901) 21.539,1.017 cw(c29.399,60.581) 1.001,7.636 cw(c1.899,9.31) -0.001,9.31 -0.001,34.095 58.799,34.095 58.799,9.31 cw(c56.899,9.31) 57.797,7.636 cw(c29.399,60.581) 37.259,1.017 cw(c37.011,2.901) 37.011,1.001
Top 3D Body:
  text "WM06DN03D" at 24.9,20.478 h1.52